# EAGLE board 4017-7Segment (EAGLE 7.6.0)
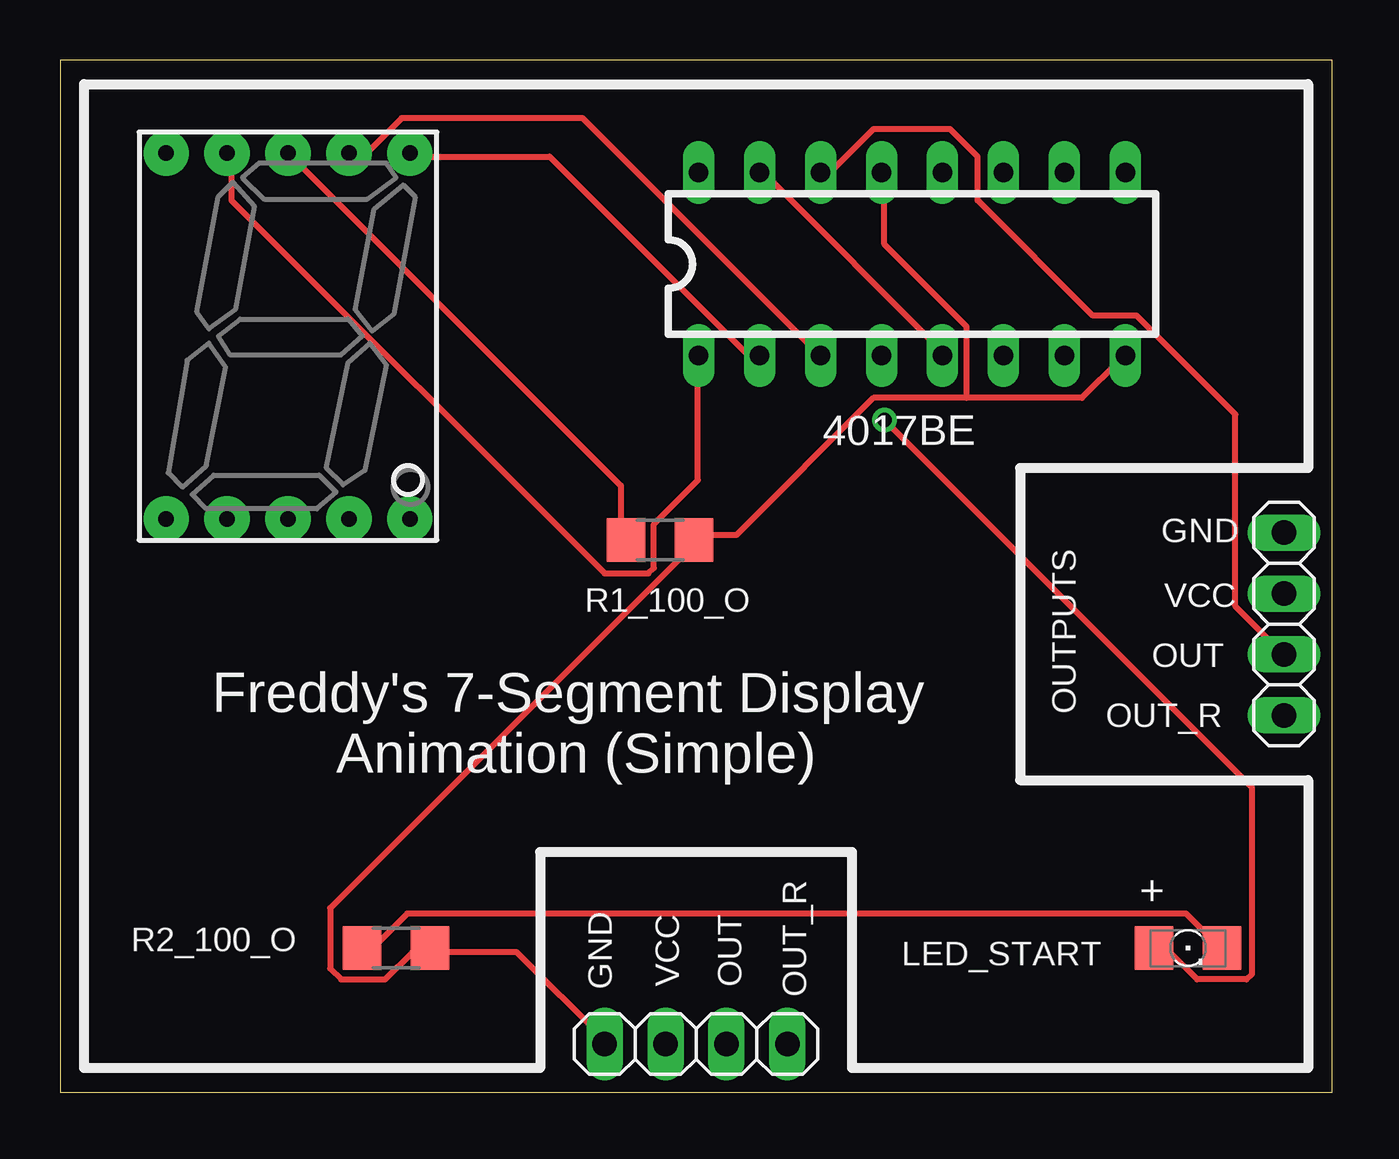
[diagram p0: board, top side]
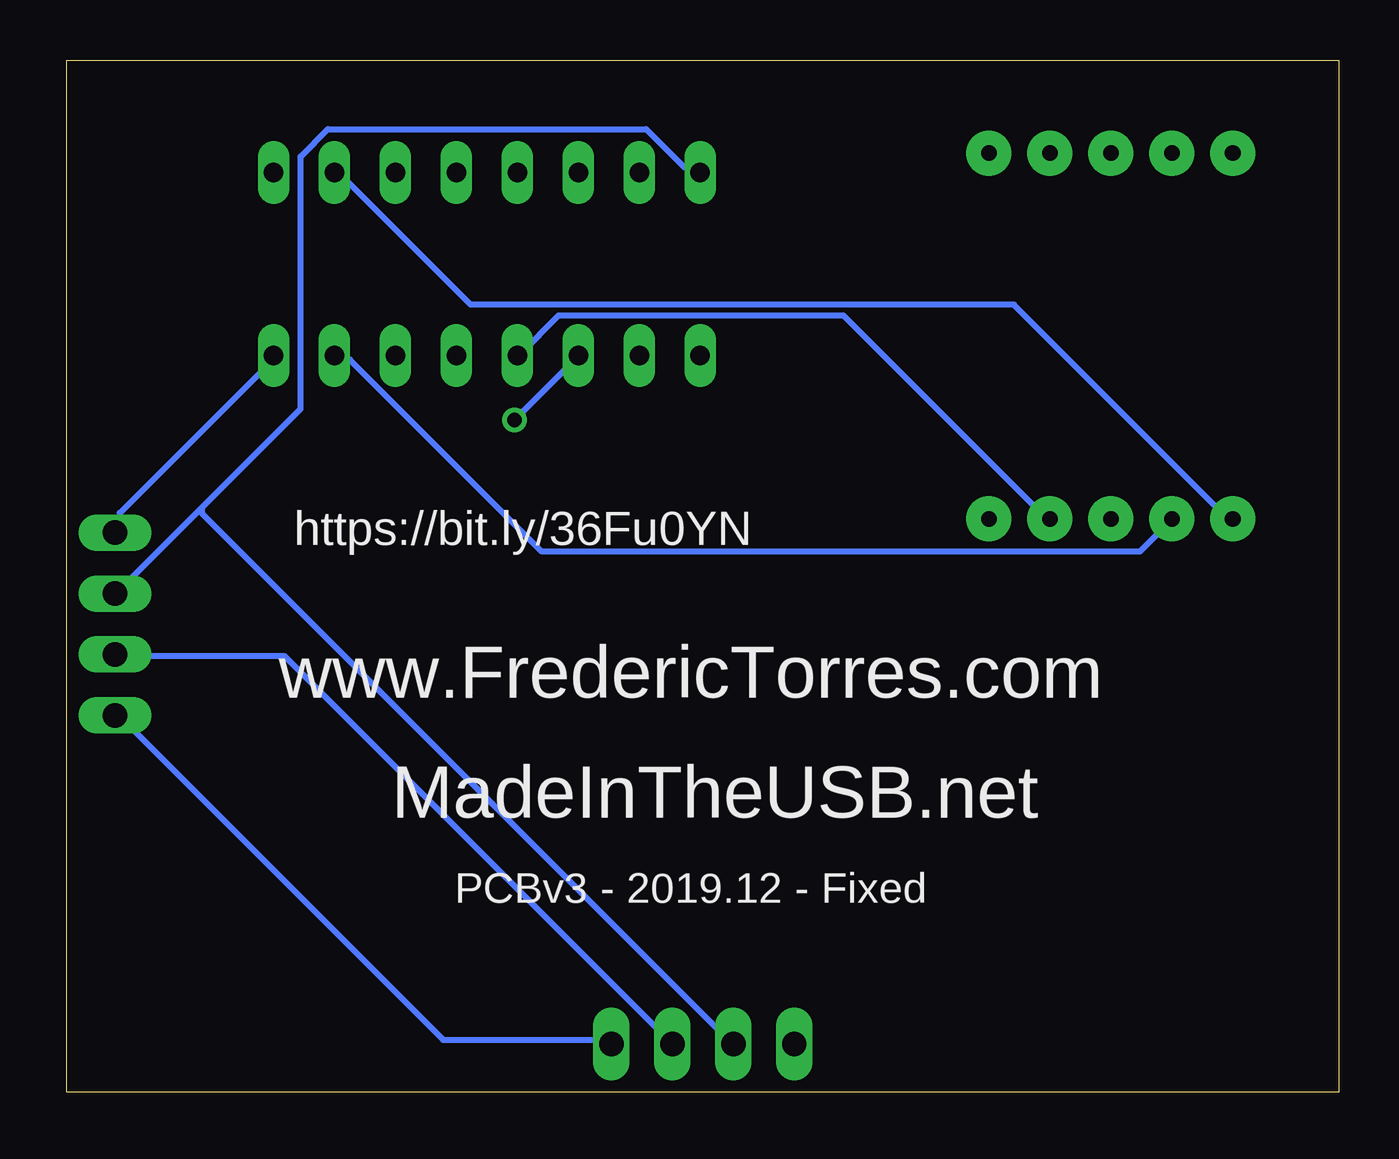
[diagram p1: board, bottom side, seen from below]

Size 53 x 43 mm. Coordinates in mm from the lower left corner, seen from the top.
Outline: 0,0 53,0 53,43 0,43 0,0
Copper layers (1*16): Top 0.035mm / dielectric 1.5mm / Bottom 0.035mm
Design rules "default": minimum track width 10mil, minimum drill 24mil, track to track 8mil, track to pad 8mil, pad to pad 8mil, via to via 8mil, smd to smd 8mil, copper to edge 40mil, drill to drill 8mil, minimum pad ring 10mil, minimum via ring 8mil, stop-mask expansion 4mil, vias tented up to drill 0mil, thermal gap 10mil

## Footprints (pad centres in the part's own frame; a part is rotated, then mirrored left to right if it is on the bottom)
DIL16 = drill 0.813 long: 1 -8.89,-3.81; 2 -6.35,-3.81; 3 -3.81,-3.81; 4 -1.27,-3.81; 5 1.27,-3.81; 6 3.81,-3.81; 7 6.35,-3.81; 8 8.89,-3.81; 9 8.89,3.81; 10 6.35,3.81; 11 3.81,3.81; 12 1.27,3.81; 13 -1.27,3.81; 14 -3.81,3.81; 15 -6.35,3.81; 16 -8.89,3.81
1X04 = drill 1.016 long: 1 -3.81,0; 2 -1.27,0; 3 1.27,0; 4 3.81,0
1206 = smd 1.6 x 1.803: A -1.422,0; C 1.422,0
R1206 = smd 1.6 x 1.803: 1 -1.422,0; 2 1.422,0
7-SEGMENT-DISPLAY = drill 0.65 pad 1.88: 1 -5.08,-7.62; 2 -2.54,-7.62; 3 0,-7.62; 4 2.54,-7.62; 5 5.08,-7.62; 6 5.08,7.62; 7 2.54,7.62; 8 0,7.62; 9 -2.54,7.62; 10 -5.08,7.62

## Placement (x,y rotation side)
4017BE  CD4017  [DIL16]  35.5,34.5 0 top
JP_CLOCK_IN  [1X04]  26.5,2 0 top
LED_START  [1206]  47,6 0 top
OUTPUTS  [1X04]  51,19.5 270 top
R1_100_O  [R1206]  25,23 180 top
R2_100_O  [R1206]  14,6 180 top
U$1  7-SEGMENT-DISPLAYPTH  [7-SEGMENT-DISPLAY]  9.5,31.5 0 top

## Library data of the parts
4017BE = SparkFun-DigitalIC; PROD_ID: IC-11929
JP_CLOCK_IN OUTPUTS = pinhead
LED_START R1_100_O R2_100_O = adafruit
U$1 = SparkFun-Displays

## Nets
GND: 4017BE.8 4017BE.13 JP_CLOCK_IN.1 OUTPUTS.1 R1_100_O.1 R2_100_O.1
N$1: LED_START.C R2_100_O.2
N$2: R1_100_O.2 U$1.8
RESET: 4017BE.5 4017BE.15
SEG_A: 4017BE.3 LED_START.A U$1.7
SEG_B: 4017BE.2 U$1.6
SEG_C: 4017BE.4 U$1.4
SEG_D: 4017BE.7 U$1.2
SEG_DP: U$1.5
SEG_E: 4017BE.10 U$1.1
SEG_F: 4017BE.1 U$1.9
SEG_G: U$1.10
TMR555_OUTPUT: 4017BE.14 JP_CLOCK_IN.3 OUTPUTS.3
TMR555_OUTPUT_REVERSE: JP_CLOCK_IN.4 OUTPUTS.4
VCC: 4017BE.16 JP_CLOCK_IN.2 OUTPUTS.2

## Tracks (layer width: path | path; a pad name or v marks a point on that pad's centre or on a via)
GND
  Top 0.254: JP_CLOCK_IN.1 22.69,2.17 19.03,5.83 15.6,5.83 R2_100_O.1 15.37,5.83 14.69,5.83 13.54,4.69 11.72,4.69 11.26,5.14 11.26,7.66 26.57,22.98 R1_100_O.1 26.57,23.2 28.18,23.2 33.89,28.92 37.78,28.92 | 37.78,28.92 42.58,28.92 44.18,30.52 4017BE.8 | 37.78,28.92 37.78,31.89 34.35,35.32 34.35,38.29 4017BE.13
  Bottom 0.254: OUTPUTS.1 50.81,23.43 50.81,24.12 44.41,30.52 4017BE.8
N$1
  Top 0.254: R2_100_O.2 12.63,6.06 13.09,6.06 14.46,7.43 46.92,7.43 48.29,6.06 LED_START.C
N$2
  Top 0.254: R1_100_O.2 23.38,23.2 23.38,25.26 9.66,38.98 U$1.8
RESET
  Top 0.254: 4017BE.15 29.32,38.29 36.86,30.75 4017BE.5
SEG_A  (via drill 0.61)
  Top 0.254: v34.35,28.01 49.66,12.69 49.66,4.92 49.44,4.69 47.38,4.69 46.23,5.83 45.78,5.83 LED_START.A | U$1.7 12.17,39.21 12.86,39.21 14.23,40.58 21.77,40.58 31.6,30.75 4017BE.3
  Bottom 0.254: v34.35,28.01 31.83,30.52 4017BE.3
SEG_B
  Top 0.254: 4017BE.2 29.09,30.75 28.63,30.75 20.4,38.98 14.69,38.98 U$1.6
SEG_C
  Bottom 0.254: 4017BE.4 34.12,30.75 32.52,32.35 20.63,32.35 12.17,23.89 U$1.4
SEG_D
  Bottom 0.254: 4017BE.7 41.66,30.52 41.2,30.52 33.2,22.52 8.29,22.52 7.14,23.66 U$1.2
SEG_E
  Bottom 0.254: 4017BE.10 41.66,38.29 36.18,32.81 13.54,32.81 4.63,23.89 U$1.1
SEG_F
  Top 0.254: 4017BE.1 26.57,30.52 26.57,25.49 24.75,23.66 24.75,21.83 24.52,21.6 22.69,21.6 7.14,37.15 7.14,38.98 U$1.9
TMR555_OUTPUT
  Top 0.254: 4017BE.14 31.83,38.52 32.29,38.52 33.89,40.12 37.09,40.12 38.23,38.98 38.23,37.15 43.03,32.35 44.86,32.35 48.98,28.23 48.98,20.23 50.81,18.4 OUTPUTS.3
  Bottom 0.254: JP_CLOCK_IN.3 27.95,2.17 43.95,18.18 50.81,18.18 OUTPUTS.3
TMR555_OUTPUT_REVERSE
  Bottom 0.254: JP_CLOCK_IN.4 30.46,2.17 37.32,2.17 50.81,15.66 OUTPUTS.4
VCC
  Bottom 0.254: 47.38,24.35 50.81,20.92 OUTPUTS.2 | 47.38,24.35 43.26,28.46 43.26,38.98 42.12,40.12 28.86,40.12 27.26,38.52 26.8,38.52 4017BE.16 | 47.38,24.35 47.38,24.12 25.43,2.17 JP_CLOCK_IN.2

## Text on the board
tNames: GND | VCC | OUT | OUT_R | Freddy's 7-Segment Display / Animation (Simple) | + | GND | VCC | OUT | OUT_R
bNames: https://bit.ly/36Fu0YN | www.FredericTorres.com | MadeInTheUSB.net | PCBv3 - 2019.12 - Fixed